# Altium PCB thymio2 capa touch round.PcbDoc
Units mm, origin at the board's own origin, x right, y up, seen from the top; angles counter-clockwise.
Board outline 44.5 x 44.5 mm, 2 copper layers (Top Layer, Bottom Layer), stack 1.571 mm thick; 1 components, 6 nets, 10 pads, 5 vias.
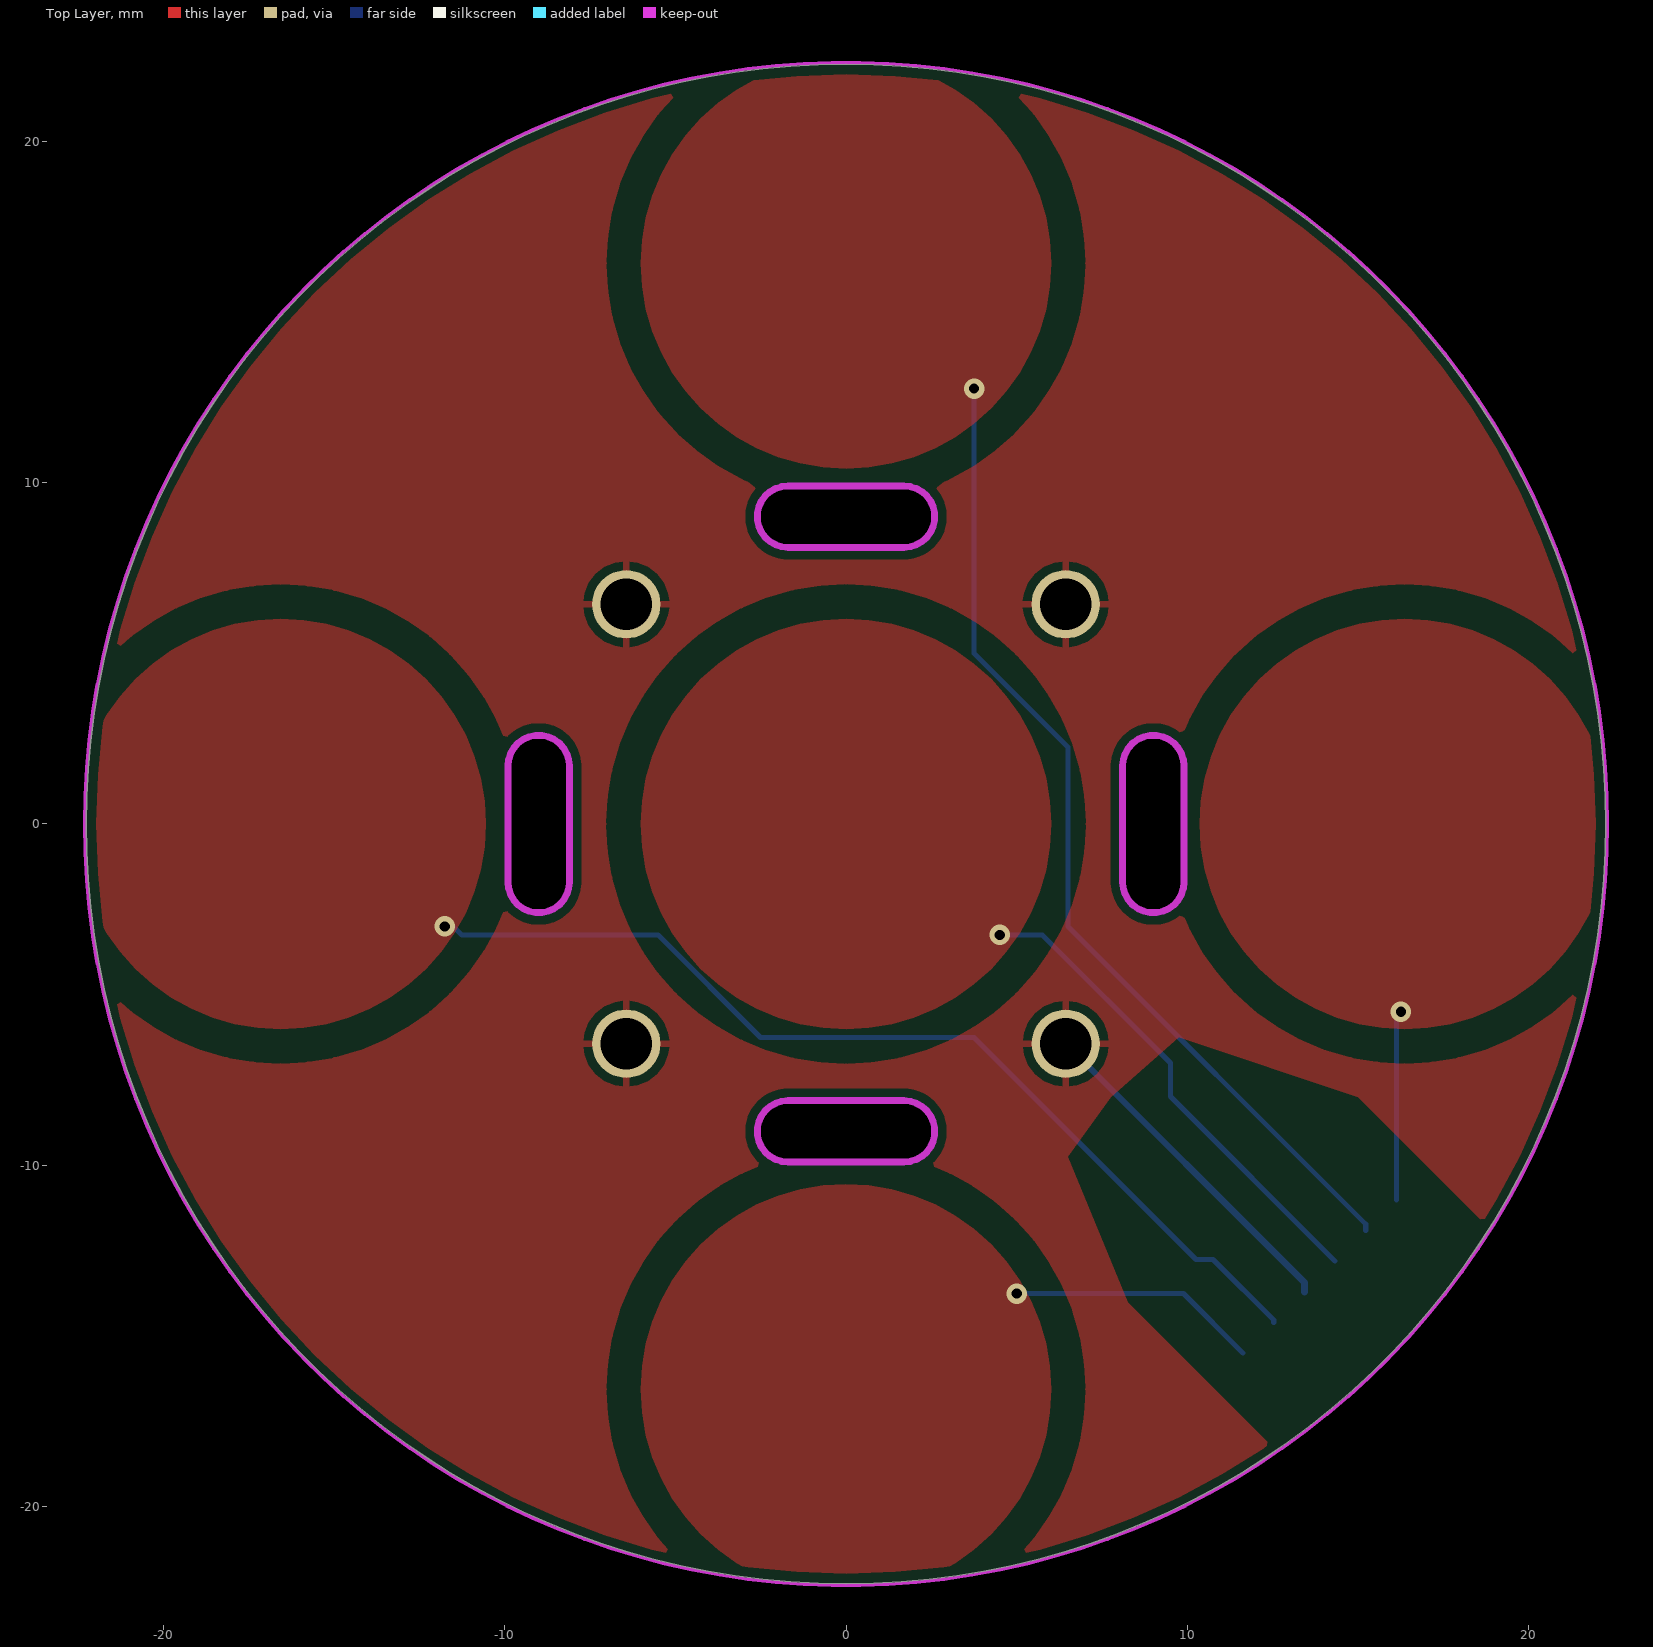
[diagram p0: Top Layer view]
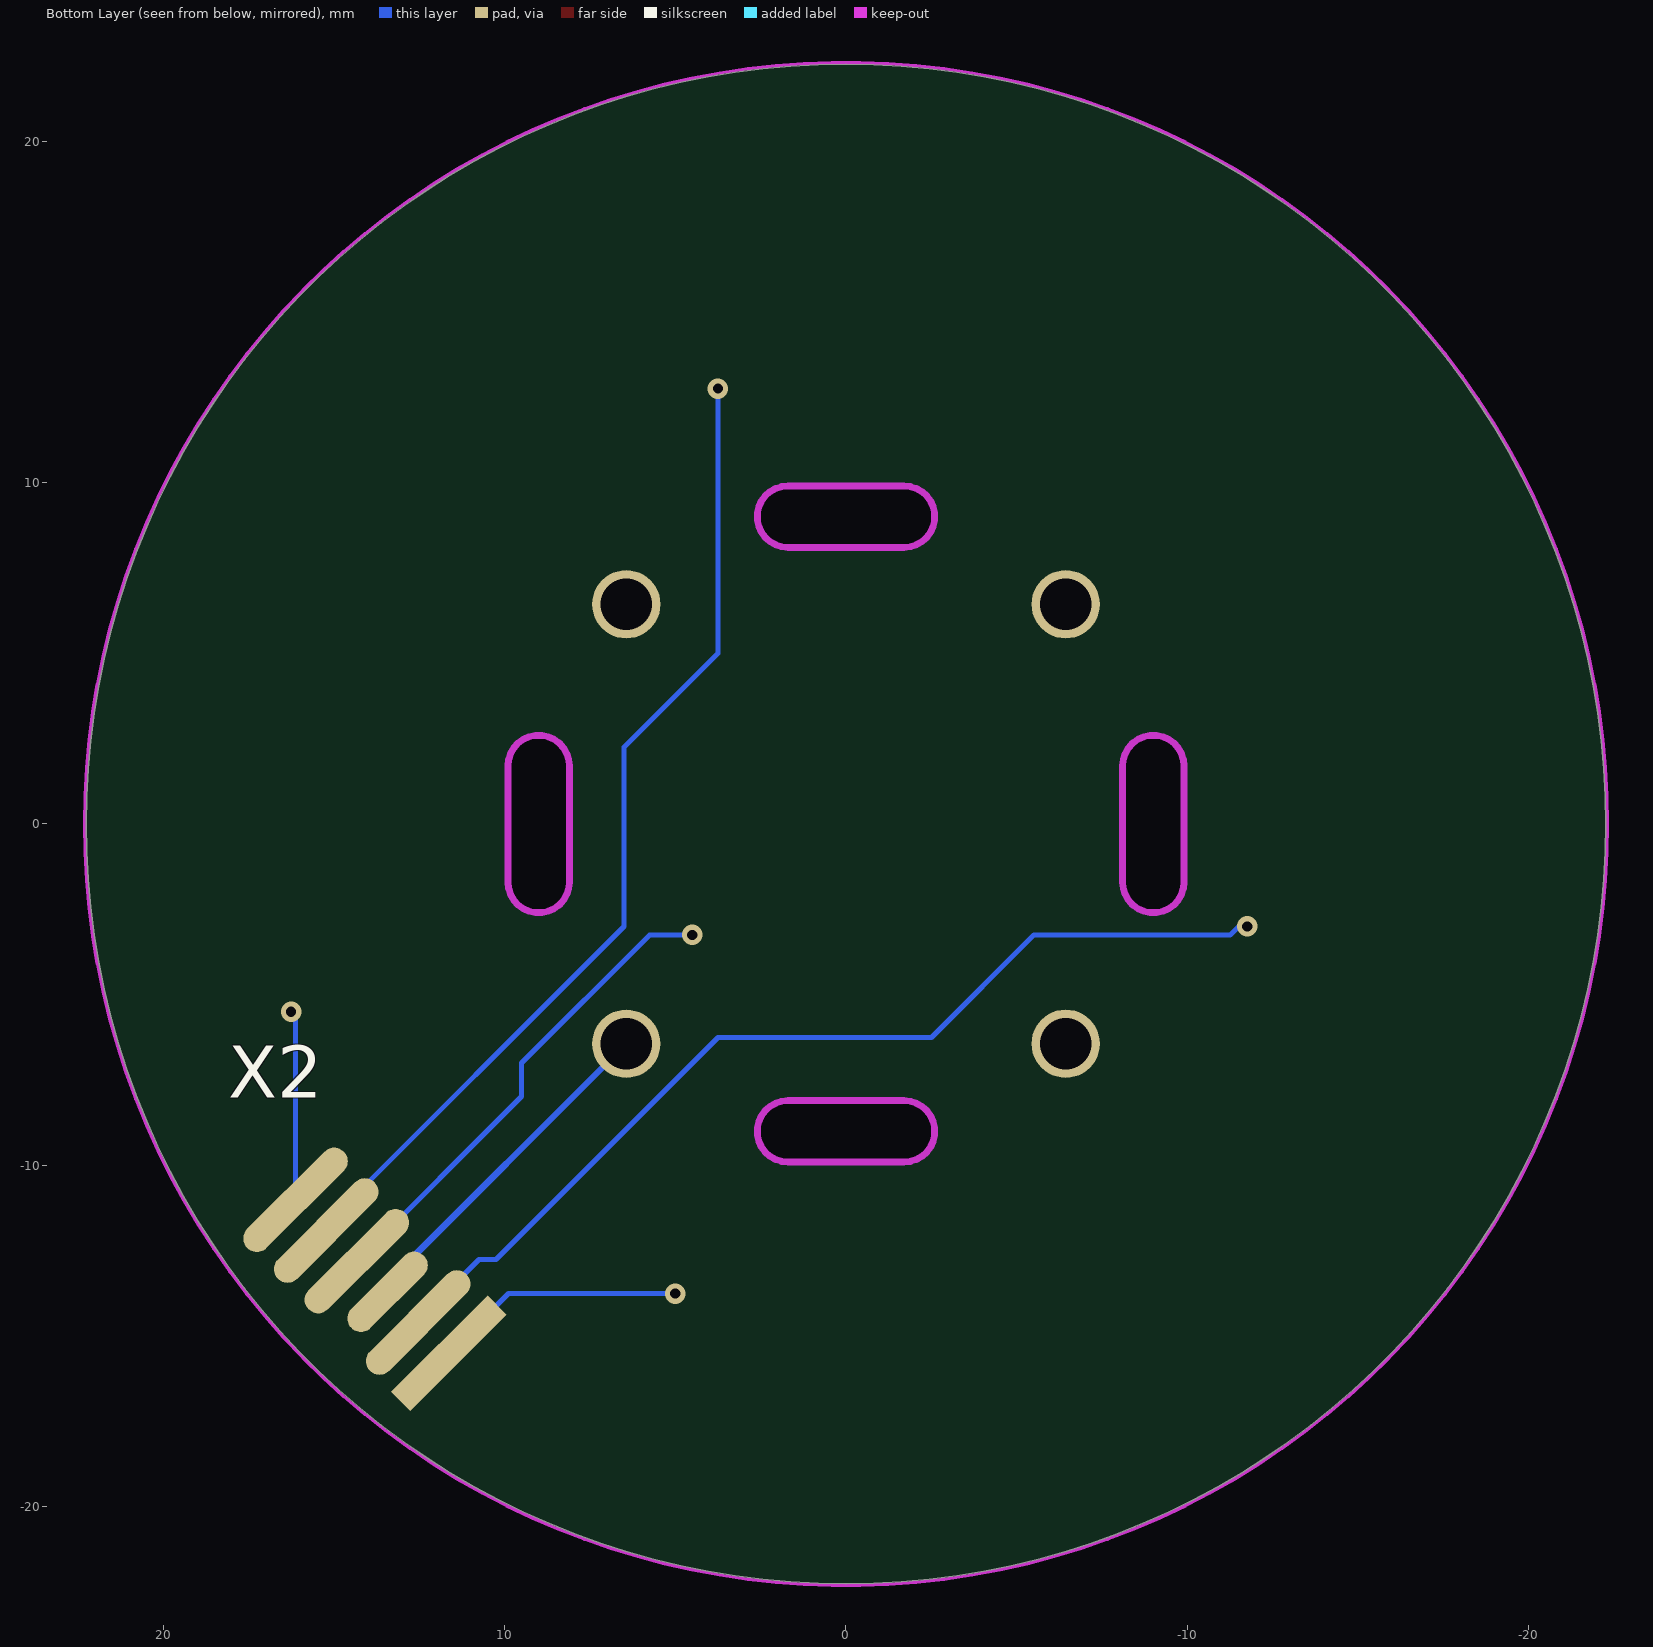
[diagram p1: Bottom Layer view, seen from below]

## Layer stack, top to bottom
Top Solder: solder mask 0.0102, Solder Resist, Dk 3.5
Top Layer: signal copper 0.0356
Dielectric1: core 1.5, FR-4, Dk 4.8
Bottom Layer: signal copper 0.0356
Bottom Solder: solder mask 0.0102, Solder Resist, Dk 3.5

## Board outline
0,-22.251 cw(c0,0) -22.251,0 cw(c0,0) 0,22.251 cw(c0,0) 22.251,0 cw(c0,0)
cut-out: 9.9,-1.7 9.9,1.7 9.88,1.887 9.822,2.066 9.728,2.229 9.602,2.369 9.45,2.479 9.278,2.556 9.094,2.595 8.906,2.595 8.722,2.556 8.55,2.479 8.398,2.369 8.272,2.229 8.178,2.066 8.12,1.887 8.1,1.7 8.1,-1.7 8.12,-1.887 8.178,-2.066 8.272,-2.229 8.398,-2.369 8.55,-2.479 8.722,-2.556 8.906,-2.595 9.094,-2.595 9.278,-2.556 9.45,-2.479 9.602,-2.369 9.728,-2.229 9.822,-2.066 9.88,-1.887
cut-out: -9.9,-1.7 -9.88,-1.887 -9.822,-2.066 -9.728,-2.229 -9.602,-2.369 -9.45,-2.479 -9.278,-2.556 -9.094,-2.595 -8.906,-2.595 -8.722,-2.556 -8.55,-2.479 -8.398,-2.369 -8.272,-2.229 -8.178,-2.066 -8.12,-1.887 -8.1,-1.7 -8.1,1.7 -8.12,1.887 -8.178,2.066 -8.272,2.229 -8.398,2.369 -8.55,2.479 -8.722,2.556 -8.906,2.595 -9.094,2.595 -9.278,2.556 -9.45,2.479 -9.602,2.369 -9.728,2.229 -9.822,2.066 -9.88,1.887 -9.9,1.7
cut-out: -1.7,8.1 1.7,8.1 1.887,8.12 2.066,8.178 2.229,8.272 2.369,8.398 2.48,8.55 2.556,8.722 2.596,8.906 2.596,9.095 2.556,9.279 2.48,9.451 2.369,9.603 2.229,9.729 2.066,9.823 1.887,9.881 1.7,9.901 -1.7,9.901 -1.887,9.881 -2.066,9.823 -2.229,9.729 -2.369,9.603 -2.48,9.451 -2.556,9.279 -2.596,9.095 -2.596,8.906 -2.556,8.722 -2.48,8.55 -2.369,8.398 -2.229,8.272 -2.066,8.178 -1.887,8.12
cut-out: -1.7,-8.1 -1.887,-8.12 -2.066,-8.178 -2.229,-8.272 -2.369,-8.398 -2.48,-8.55 -2.556,-8.722 -2.596,-8.906 -2.596,-9.095 -2.556,-9.279 -2.48,-9.451 -2.369,-9.603 -2.229,-9.729 -2.066,-9.823 -1.887,-9.881 -1.7,-9.901 1.7,-9.901 1.887,-9.881 2.066,-9.823 2.229,-9.729 2.369,-9.603 2.48,-9.451 2.556,-9.279 2.596,-9.095 2.596,-8.906 2.556,-8.722 2.48,-8.55 2.369,-8.398 2.229,-8.272 2.066,-8.178 1.887,-8.12 1.7,-8.1

## Design rules (kind name [scope] priority, off if disabled: settings)
AcuteAngle [All] p1 off: minimum=8.80000000000000E+0001 checktracksonly=FALSE
Clearance Clearance_UnderCameraPolygon [INNamedPolygon('gnd_bot') vs (IsRegion)] p1: gap=1 ignorepadtopadclearanceinfootprint=FALSE except(0: Arc-Hole Track-Hole SMDPad-Hole THPad-Hole Via-Hole Fill-Hole Poly-Hole Region-Hole Text-Hole)
Clearance [INNamedPolygon('gnd_bot')] p2: gap=0.254 ignorepadtopadclearanceinfootprint=FALSE except(0: Arc-Hole Track-Hole SMDPad-Hole THPad-Hole Via-Hole Fill-Hole Poly-Hole Region-Hole Text-Hole)
Clearance Clearance_Polygon [(InNet('GND'))] p3 off: gap=3 ignorepadtopadclearanceinfootprint=FALSE except(0: Arc-Hole Track-Hole SMDPad-Hole THPad-Hole Via-Hole Fill-Hole Poly-Hole Region-Hole Text-Hole)
Clearance Clearance_Normal [All] p4: gap=0.3 ignorepadtopadclearanceinfootprint=FALSE except(0: Arc-Hole Track-Hole SMDPad-Hole THPad-Hole Via-Hole Fill-Hole Poly-Hole Region-Hole Text-Hole)
ComponentClearance ComponentClearance_MirrorLed [(InComponentClass('MirrorLed')) vs (InComponentClass('MirrorLed'))] p1: gap=0 collisioncheckmode=3 verticalgap=0 showdistances=FALSE
ComponentClearance ComponentClearance_TubeCamera [(InComponentClass('TubeCamera')) vs (InComponentClass('TubeCamera'))] p2: gap=0 collisioncheckmode=3 verticalgap=0 showdistances=FALSE
ComponentClearance [All] p3: gap=0.2 collisioncheckmode=3 verticalgap=0.2 showdistances=FALSE
FabricationTestPointUsage TestPointUsage [All] p1: valid=0 allowmultiple=FALSE
FabricationTestpoint Testpoint [All] p1: side=3 testpointundercomponent=TRUE minsize=1.016 maxsize=2.54 preferedsize=1.524 minholesize=0 maxholesize=1.016 preferedholesize=0.813 testpointgrid=0.025 allowsidetop=TRUE allowsidebottom=TRUE usegrid=TRUE gridtolerance=0
Height [All] p1 off: minheight=0 maxheight=25.4 prefheight=12.7
HoleSize [All] p1: absolutevalues=TRUE maxlimit=6 minlimit=0.3 maxpercent=80.000 minpercent=20.000
MinimumAnnularRing [All] p1: minimumring=0.15
MinimumSolderMaskSliver [All] p1: minsoldermaskwidth=0.2
PlaneClearance [All] p1: clearance=0.4
PlaneConnect [All] p1: planeconnectstyle=Relief reliefexpansion=0.508 reliefentries=4 reliefconductorwidth=0.2 reliefairgap=0.254
PolygonConnect PolygonConnect_BigHole [ispad and (HoleSize >= 2.0)] p1: connectstyle=Direct reliefconductorwidth=0.254 reliefentries=4 polygonreliefangle="90 Angle" airgapwidth=0.254
PolygonConnect PolygonConnect_Via [IsVia] p2: connectstyle=Direct reliefconductorwidth=0.254 reliefentries=4 polygonreliefangle="90 Angle" airgapwidth=0.254
PolygonConnect PolygonConnect_DirectConnect [(ispad and (PadXSize_AllLayers >= 4.0))] p3: connectstyle=Direct reliefconductorwidth=0.254 reliefentries=4 polygonreliefangle="90 Angle" airgapwidth=0.254
PolygonConnect PolygonConnect_NoConnect [HasFootprint('SAMTEC_FTS*')] p4 off: connectstyle=NoConnect reliefconductorwidth=0.254 reliefentries=4 polygonreliefangle="90 Angle" airgapwidth=0.254
PolygonConnect [All] p5: connectstyle=Relief reliefconductorwidth=0.2 reliefentries=4 polygonreliefangle="90 Angle" airgapwidth=0.254
RoutingCorners [All] p1: cornerstyle=45-Degree minsetback=1 maxsetback=2.54
RoutingVias [All] p1: holewidth=0.3 width=0.6 viastyle="Through Hole" minholewidth=0.3 minwidth=0.6 maxholewidth=1 maxwidth=4
SMDToCorner [All] p1 off: distance=78740
SMDToPlane [All] p1 off: distance=118110
SilkToSilkClearance [All] p1: silktosilkclearance=0.2
SilkToSolderMaskClearance SilkscreenOverComponentPads [IsPad] p1: minsilkscreentomaskgap=0.2 clearancetoexposedcopper=TRUE
SolderMaskExpansion SolderMaskExpansion_Via [isVia] p1: expansion=-5
SolderMaskExpansion [All] p2: expansion=0.102
ViasUnderSMD [All] p1: allowed=FALSE
Width [All] p1: maxlimit=5 minlimit=0.15 preferedwidth=0.2 minimp=50.000000 maximp=50.000000 favimp=50.000000
19 further rules are at their usual default settings.

## Components (designator, comment, footprint, x,y, rotation, side; value= is the part's Value field where it differs from the comment)
X2 "Comment" "Edge 6" 11.629,-15.496 r45 bottom

## Footprints (in the part's own frame and the unit in brackets; to place one, negate y for a bottom-side part, rotate by r counter-clockwise, add the part's x,y. Pads: shape width x height; smd on the part's side, far side on the other; paste and mask are expansions set on the pad)
"Edge 6" [mm]
  rect 0.8x4 smd: 1(0,0)
  oval 0.8x4 smd: 2(1.27,0) 4(3.81,0) 5(5.08,0) 6(6.35,0)
  oval 0.8x3 smd: 3(2.54,0)

## Free pads (board coordinates)
  round 2 hole 1.5: 0(-6.435,-6.435) 0(-6.435,6.435) 0(6.435,6.435) 0(6.435,-6.435)

## Via types
v1: diameter 0.6, hole 0.3, Top Layer to Bottom Layer, 5 vias

## Nets (pads, with @x,y where several pads share a name; then routed paths per layer and width w, separated by ;. In a path a pad name is that pad's centre, name@x,y a point inside that pad or via, vN(x,y) a via of type N, cw(c..) or ccw(c..) an arc to the next point about the centre after c; other vN are vias at no path point)
Button1: X2.1 | length 7.4
  Bottom Layer w0.15: v1(5,-13.75) 9.883,-13.75 X2.1
Button2: X2.2 | length 28.9
  Bottom Layer w0.15: v1@-11.5,-3 -11.25,-3.25 -5.5,-3.25 -2.5,-6.25 3.75,-6.25 10.25,-12.75 10.75,-12.75 12.527,-14.527 X2.2
  other v1: -11.75,-3
Button3: X2.4 | length 14.4
  Bottom Layer w0.15: v1(4.5,-3.25) 5.75,-3.25 9.5,-7 9.5,-7.979 X2.4
Button4: X2.5 | length 29.4
  Bottom Layer w0.15: v1(3.75,12.75) 3.75,5 6.5,2.25 6.5,-3 15.221,-11.721 X2.5
Button5: X2.6 | length 5.6
  Bottom Layer w0.15: X2.6 16.119,-5.631 v1(16.25,-5.5)
GND: pad.0 X2.3 | length 10.2
  Bottom Layer w0.2: pad.0@6.435,-6.435 13.425,-13.425 X2.3

## Polygon pours and split planes (outlines as drawn)
Button3 on Top Layer "Top Layer-No Net 1" (solid, pour order 1000): 0,-6 cw(c0,0) -6,0 cw(c0,0) 0,6 cw(c0,0) 6,0 cw(c0,0)
Button5 on Top Layer "Top Layer-No Net 1" (solid, pour order 1001): 16.362,-6 cw(c16.362,0) 10.362,0 cw(c16.362,0) 16.362,6 cw(c16.362,0) 22.362,0 cw(c16.362,0)
Button4 on Top Layer "Top Layer-No Net 1" (solid, pour order 1002): 0,10.418 cw(c0,16.418) -6,16.418 cw(c0,16.418) 0,22.418 cw(c0,16.418) 6,16.418 cw(c0,16.418)
Button2 on Top Layer "Top Layer-No Net 1" (solid, pour order 1003): -16.556,-6 cw(c-16.556,0) -22.556,0 cw(c-16.556,0) -16.556,6 cw(c-16.556,0) -10.556,0 cw(c-16.556,0)
Button1 on Top Layer "Top Layer-No Net 1" (solid, pour order 1004): 0,-22.556 cw(c0,-16.556) -6,-16.556 cw(c0,-16.556) 0,-10.556 cw(c0,-16.556) 6,-16.556 cw(c0,-16.556)
GND on Top Layer "gnd_bot" (solid, remove dead copper, pour order 1005): -23,23 23.5,23 23.5,-22 23,-22.5 22.5,-23 -24,-23 -24,23

## Keep-outs
Keep-Out Layer:
  circle w0.1: c0,0 r22.301
  lines w0.2: -9.9,-1.7 -9.88,-1.887 -9.822,-2.066 -9.728,-2.229 -9.602,-2.369 -9.45,-2.479 -9.278,-2.556 -9.094,-2.595 -8.906,-2.595 -8.722,-2.556 -8.55,-2.479 -8.398,-2.369 -8.272,-2.229 -8.178,-2.066 -8.12,-1.887 -8.1,-1.7 -8.1,1.7 -8.12,1.887 -8.178,2.066 -8.272,2.229 -8.398,2.369 -8.55,2.479 -8.722,2.556 -8.906,2.595 -9.094,2.595 -9.278,2.556 -9.45,2.479 -9.602,2.369 -9.728,2.229 -9.822,2.066 -9.88,1.887 -9.9,1.7 -9.9,-1.7 ; -2.596,-9.095 -2.556,-9.279 -2.48,-9.451 -2.369,-9.603 -2.229,-9.729 -2.066,-9.823 -1.887,-9.881 -1.7,-9.901 1.7,-9.901 1.887,-9.881 2.066,-9.823 2.229,-9.729 2.369,-9.603 2.48,-9.451 2.556,-9.279 2.596,-9.095 2.596,-8.906 2.556,-8.722 2.48,-8.55 2.369,-8.398 2.229,-8.272 2.066,-8.178 1.887,-8.12 1.7,-8.1 -1.7,-8.1 -1.887,-8.12 -2.066,-8.178 -2.229,-8.272 -2.369,-8.398 -2.48,-8.55 -2.556,-8.722 -2.596,-8.906 -2.596,-9.095 ; -2.596,8.906 -2.556,8.722 -2.48,8.55 -2.369,8.398 -2.229,8.272 -2.066,8.178 -1.887,8.12 -1.7,8.1 1.7,8.1 1.887,8.12 2.066,8.178 2.229,8.272 2.369,8.398 2.48,8.55 2.556,8.722 2.596,8.906 2.596,9.095 2.556,9.279 2.48,9.451 2.369,9.603 2.229,9.729 2.066,9.823 1.887,9.881 1.7,9.901 -1.7,9.901 -1.887,9.881 -2.066,9.823 -2.229,9.729 -2.369,9.603 -2.48,9.451 -2.556,9.279 -2.596,9.095 -2.596,8.906 ; 8.1,-1.7 8.12,-1.887 8.178,-2.066 8.272,-2.229 8.398,-2.369 8.55,-2.479 8.722,-2.556 8.906,-2.595 9.094,-2.595 9.278,-2.556 9.45,-2.479 9.602,-2.369 9.728,-2.229 9.822,-2.066 9.88,-1.887 9.9,-1.7 9.9,1.7 9.88,1.887 9.822,2.066 9.728,2.229 9.602,2.369 9.45,2.479 9.278,2.556 9.094,2.595 8.906,2.595 8.722,2.556 8.55,2.479 8.398,2.369 8.272,2.229 8.178,2.066 8.12,1.887 8.1,1.7 8.1,-1.7

## Other copper
Top Layer:
  pour cut-out: 8.25,-14 6.5,-9.75 7.75,-8 9.75,-6.25 15,-8 20,-13 20,-13.75 14,-19.75

## Silkscreen, mask and mechanical layers (free items; w line width, h text height)
Bottom Solder:
  drawing of 18 lines, arcs and shapes, not listed
  text "Bonani M." at 2.75,20 h1.4
  text "Thymio 2 Touch Round" at 9.75,17.5 h2
  text "EPFL STI-IMT-LSRO1" at 6.5,15.75 h1.4
  text "08.11.2011 - Rev 1.3" at 6,13.5 h1.4
  text "E" at 20.5,-2 h3
Mechanical 1:
  circle w0.1: c0,0 r22.251
  lines w0.1: -9.9,-1.7 -9.88,-1.887 -9.822,-2.066 -9.728,-2.229 -9.602,-2.369 -9.45,-2.479 -9.278,-2.556 -9.094,-2.595 -8.906,-2.595 -8.722,-2.556 -8.55,-2.479 -8.398,-2.369 -8.272,-2.229 -8.178,-2.066 -8.12,-1.887 -8.1,-1.7 -8.1,1.7 -8.12,1.887 -8.178,2.066 -8.272,2.229 -8.398,2.369 -8.55,2.479 -8.722,2.556 -8.906,2.595 -9.094,2.595 -9.278,2.556 -9.45,2.479 -9.602,2.369 -9.728,2.229 -9.822,2.066 -9.88,1.887 -9.9,1.7 -9.9,-1.7 ; -2.596,-9.095 -2.556,-9.279 -2.48,-9.451 -2.369,-9.603 -2.229,-9.729 -2.066,-9.823 -1.887,-9.881 -1.7,-9.901 1.7,-9.901 1.887,-9.881 2.066,-9.823 2.229,-9.729 2.369,-9.603 2.48,-9.451 2.556,-9.279 2.596,-9.095 2.596,-8.906 2.556,-8.722 2.48,-8.55 2.369,-8.398 2.229,-8.272 2.066,-8.178 1.887,-8.12 1.7,-8.1 -1.7,-8.1 -1.887,-8.12 -2.066,-8.178 -2.229,-8.272 -2.369,-8.398 -2.48,-8.55 -2.556,-8.722 -2.596,-8.906 -2.596,-9.095 ; -2.596,8.906 -2.556,8.722 -2.48,8.55 -2.369,8.398 -2.229,8.272 -2.066,8.178 -1.887,8.12 -1.7,8.1 1.7,8.1 1.887,8.12 2.066,8.178 2.229,8.272 2.369,8.398 2.48,8.55 2.556,8.722 2.596,8.906 2.596,9.095 2.556,9.279 2.48,9.451 2.369,9.603 2.229,9.729 2.066,9.823 1.887,9.881 1.7,9.901 -1.7,9.901 -1.887,9.881 -2.066,9.823 -2.229,9.729 -2.369,9.603 -2.48,9.451 -2.556,9.279 -2.596,9.095 -2.596,8.906 ; 8.1,-1.7 8.12,-1.887 8.178,-2.066 8.272,-2.229 8.398,-2.369 8.55,-2.479 8.722,-2.556 8.906,-2.595 9.094,-2.595 9.278,-2.556 9.45,-2.479 9.602,-2.369 9.728,-2.229 9.822,-2.066 9.88,-1.887 9.9,-1.7 9.9,1.7 9.88,1.887 9.822,2.066 9.728,2.229 9.602,2.369 9.45,2.479 9.278,2.556 9.094,2.595 8.906,2.595 8.722,2.556 8.55,2.479 8.398,2.369 8.272,2.229 8.178,2.066 8.12,1.887 8.1,1.7 8.1,-1.7